# Altium PCB RFTuningBoard.PcbDoc
Units mil, origin at the board's own origin, x right, y up, seen from the top; angles counter-clockwise.
Board outline 2446.87 x 2446.87 mil, 4 copper layers (Top Layer, Ground Plane, Power Plane, Bottom Layer), stack 64.6 mil thick; 26 components, 11 nets, 65 pads, 138 vias.
Unrouted connection lines stored in the file: 3.
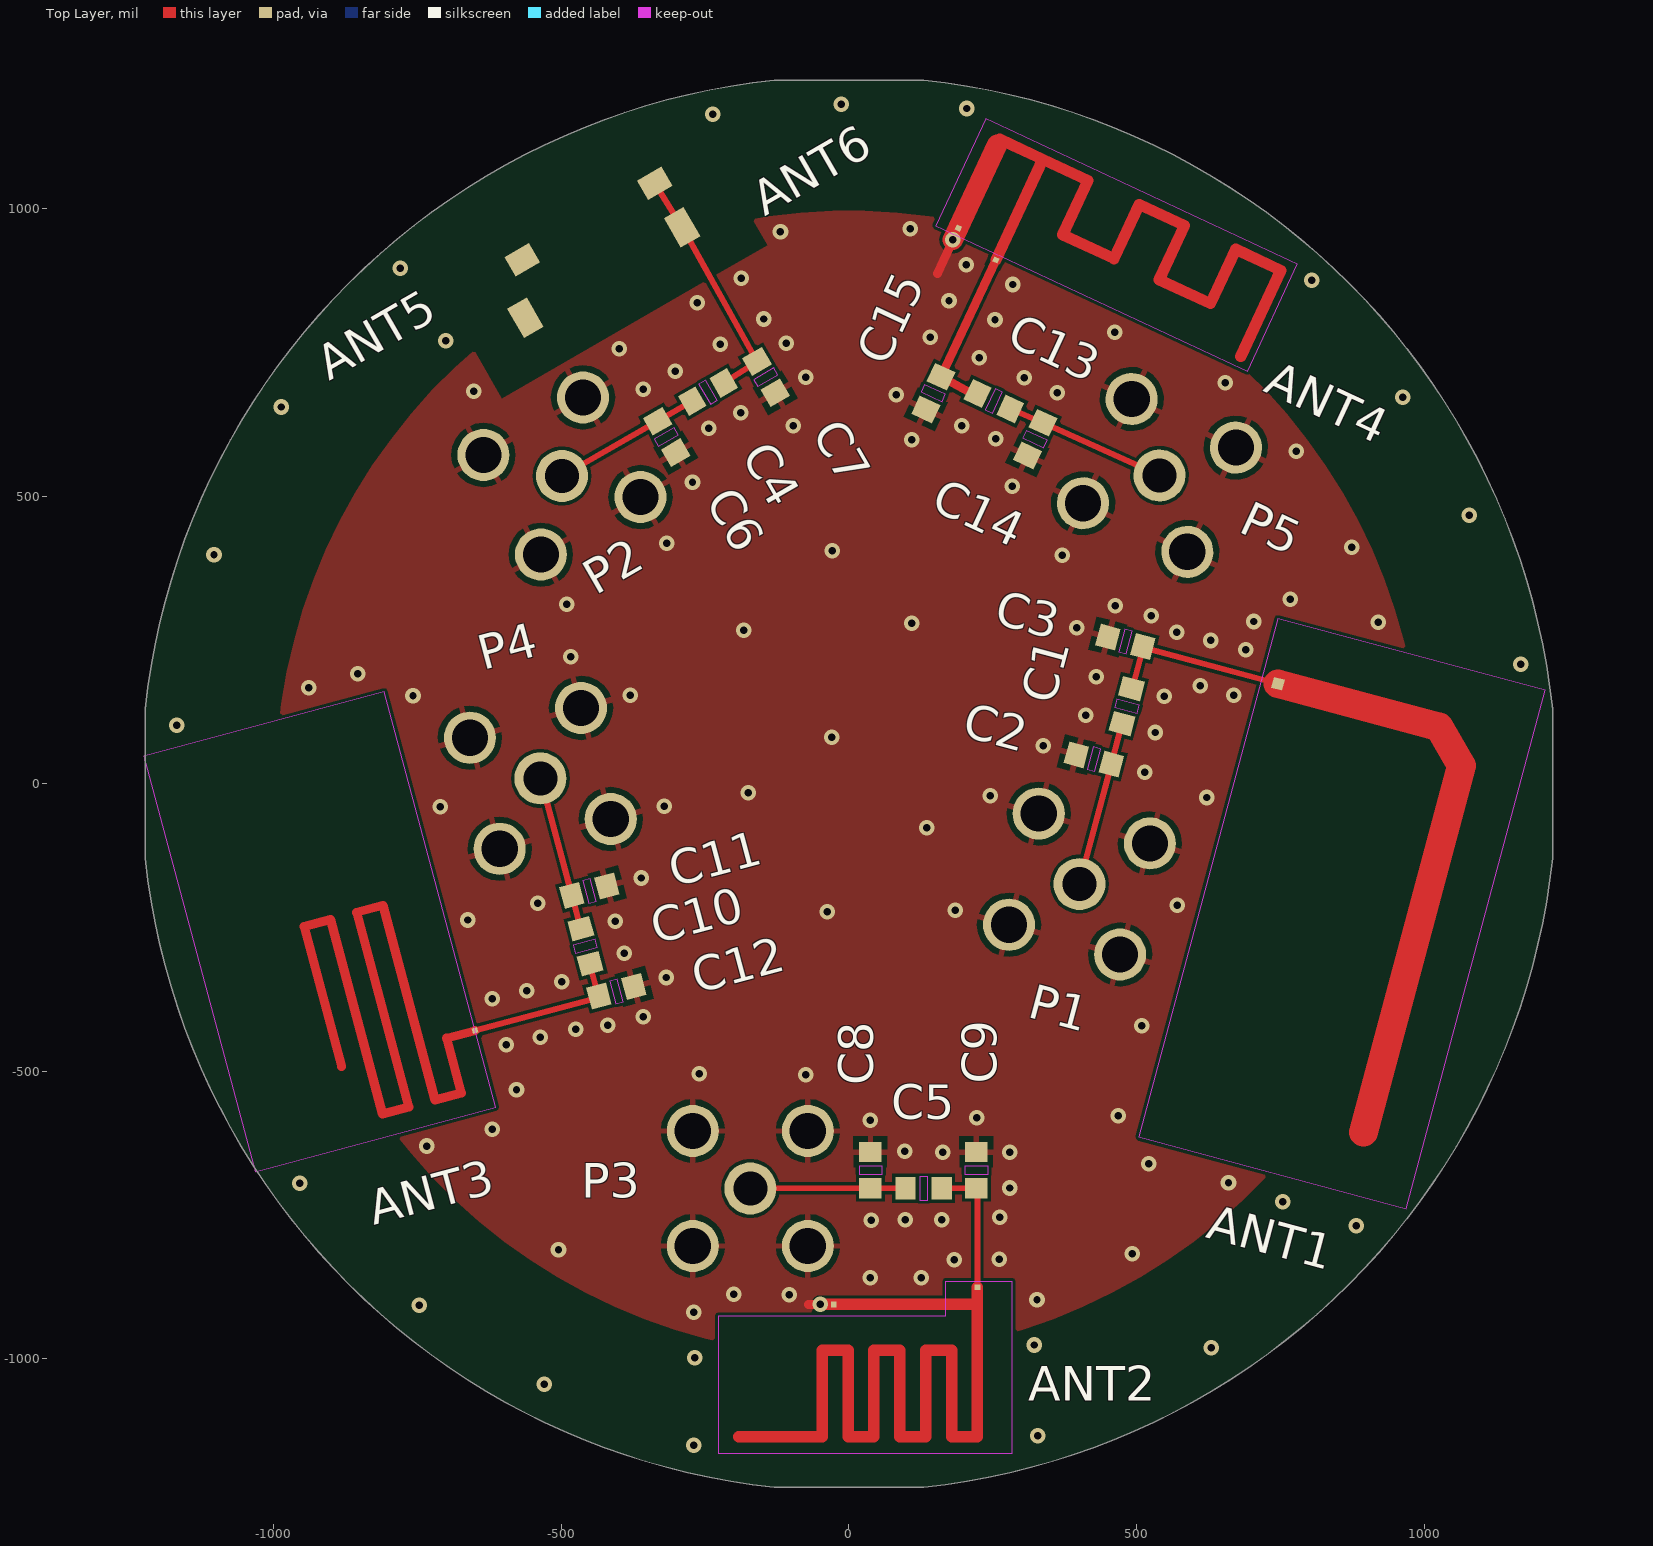
[diagram p0: Top Layer view]
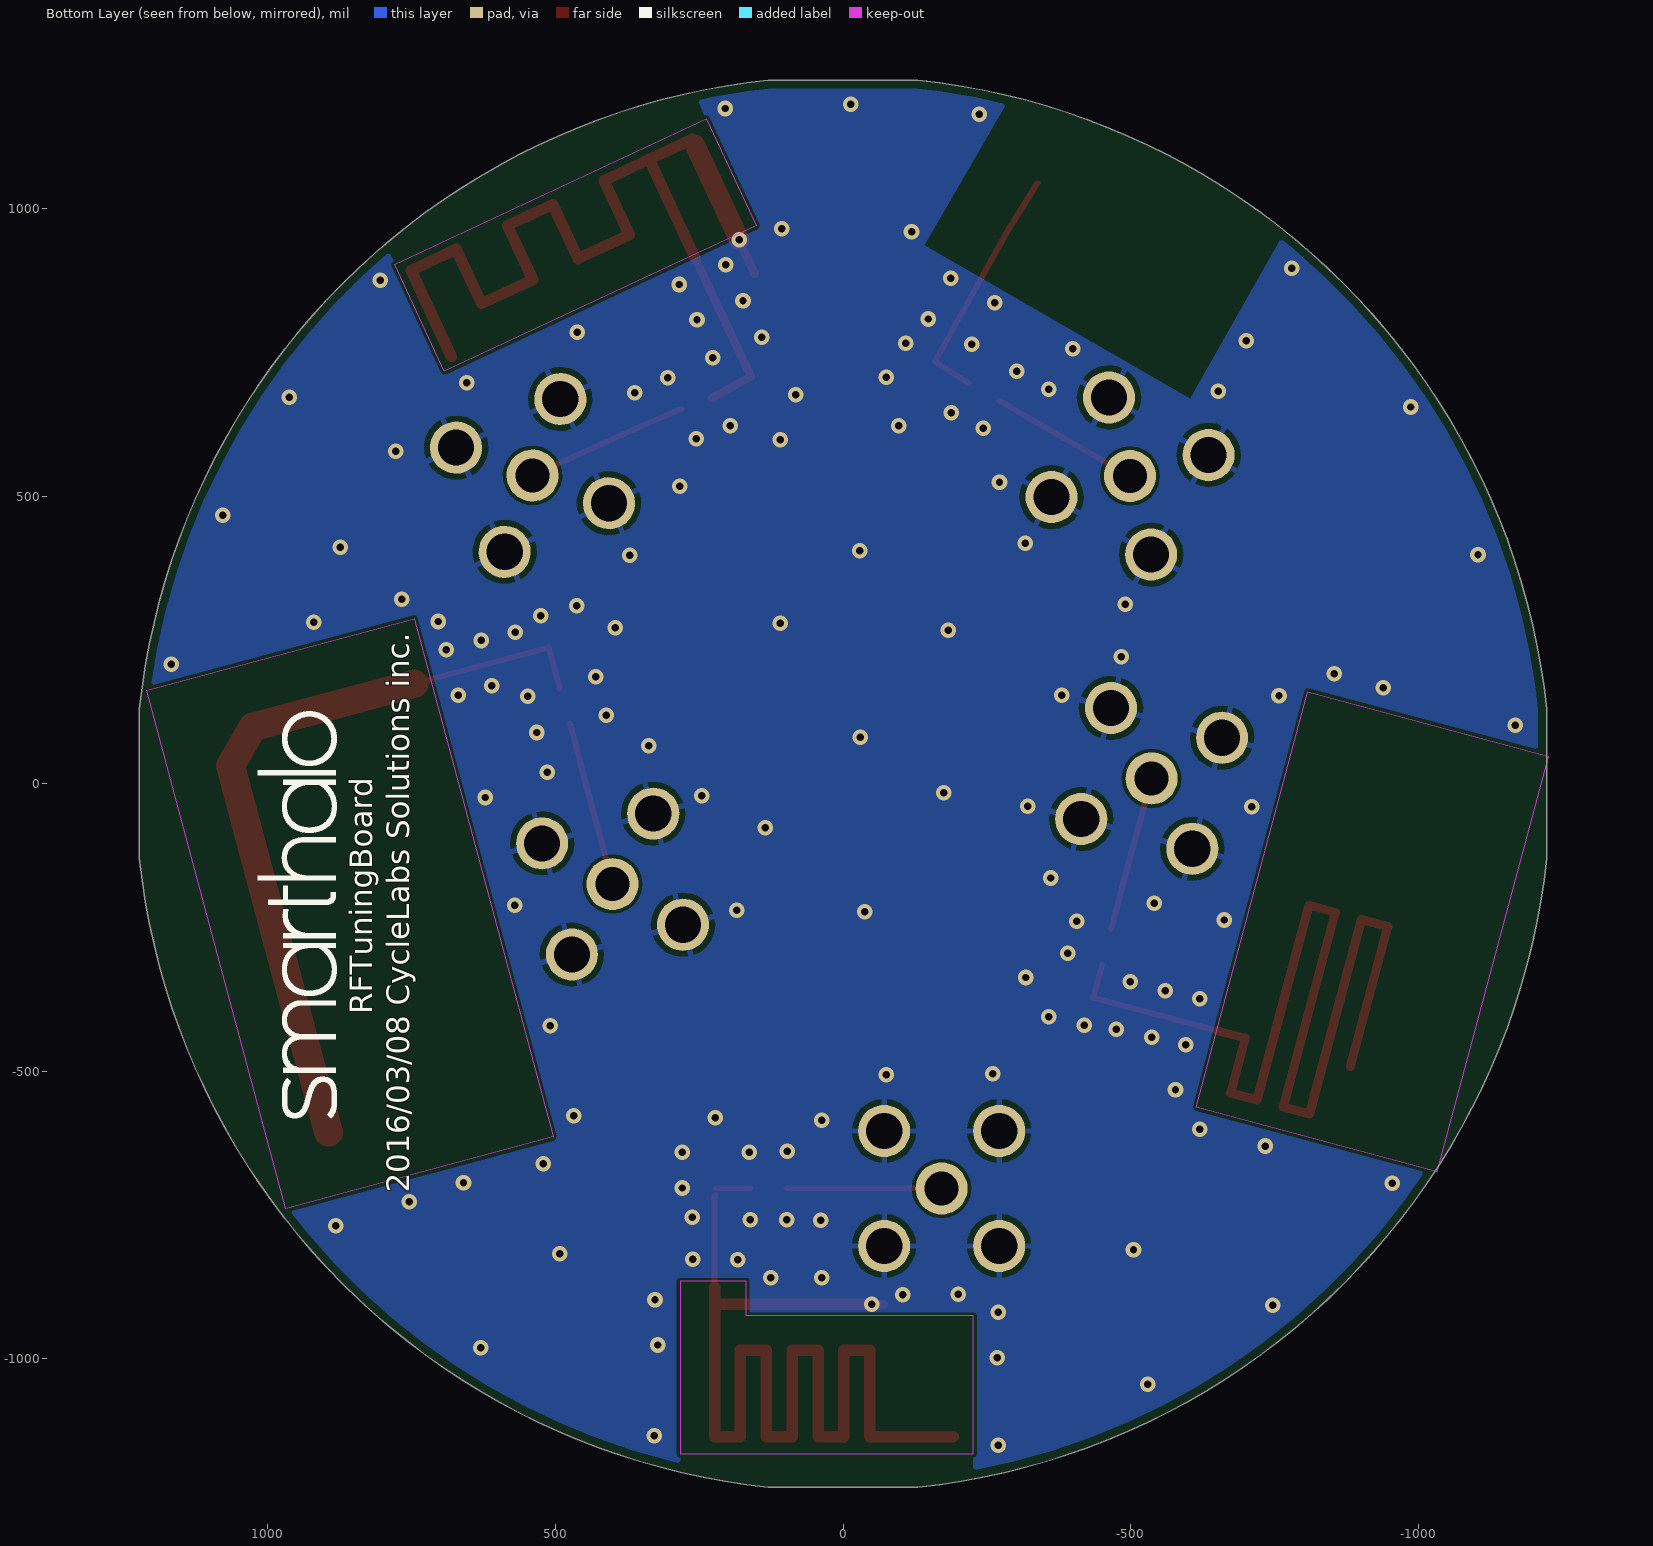
[diagram p1: Bottom Layer view, seen from below]
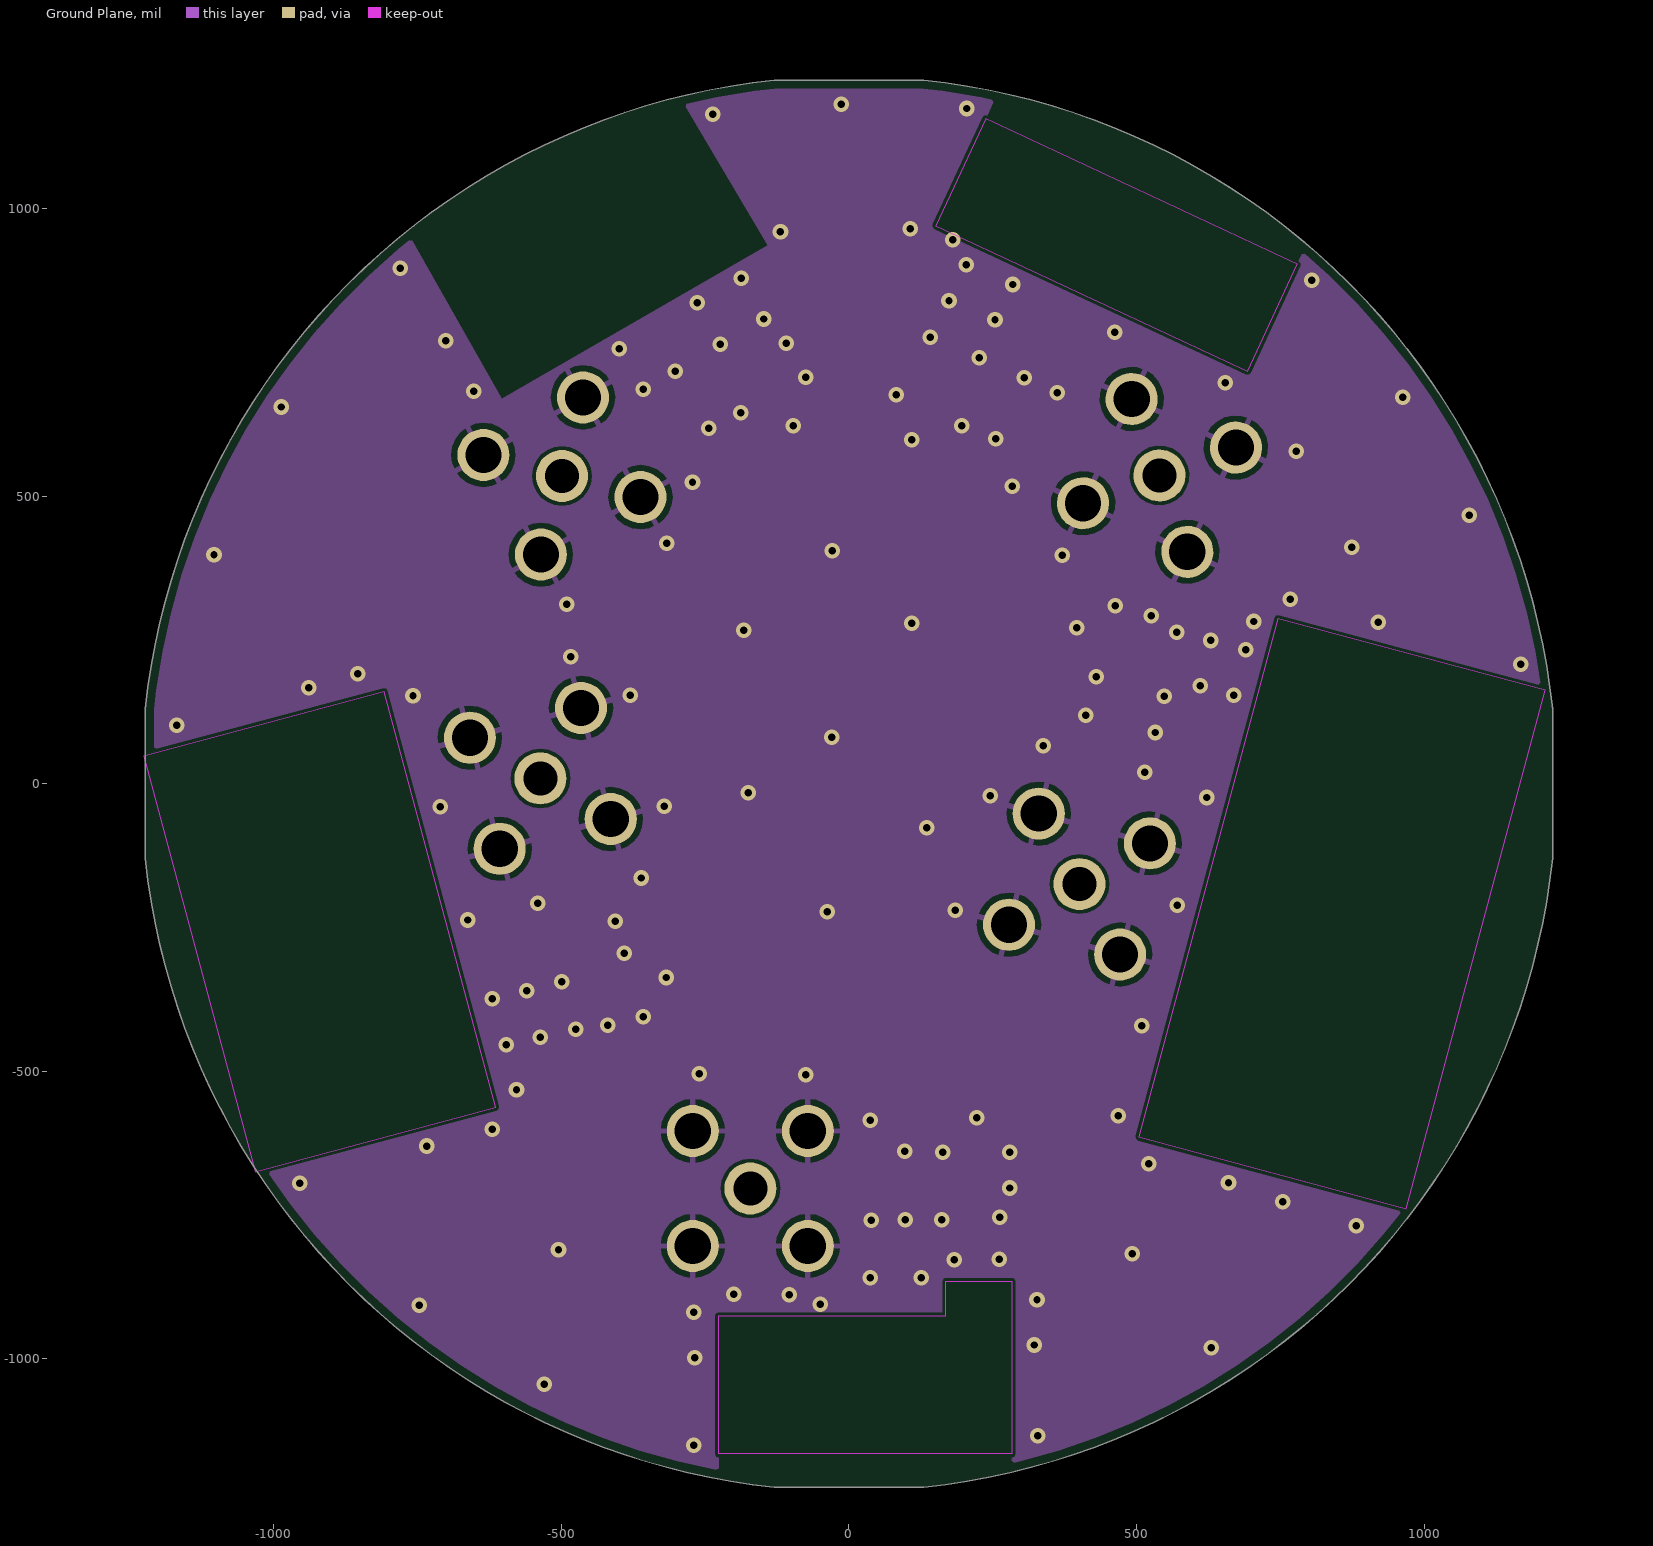
[diagram p2: Ground Plane]
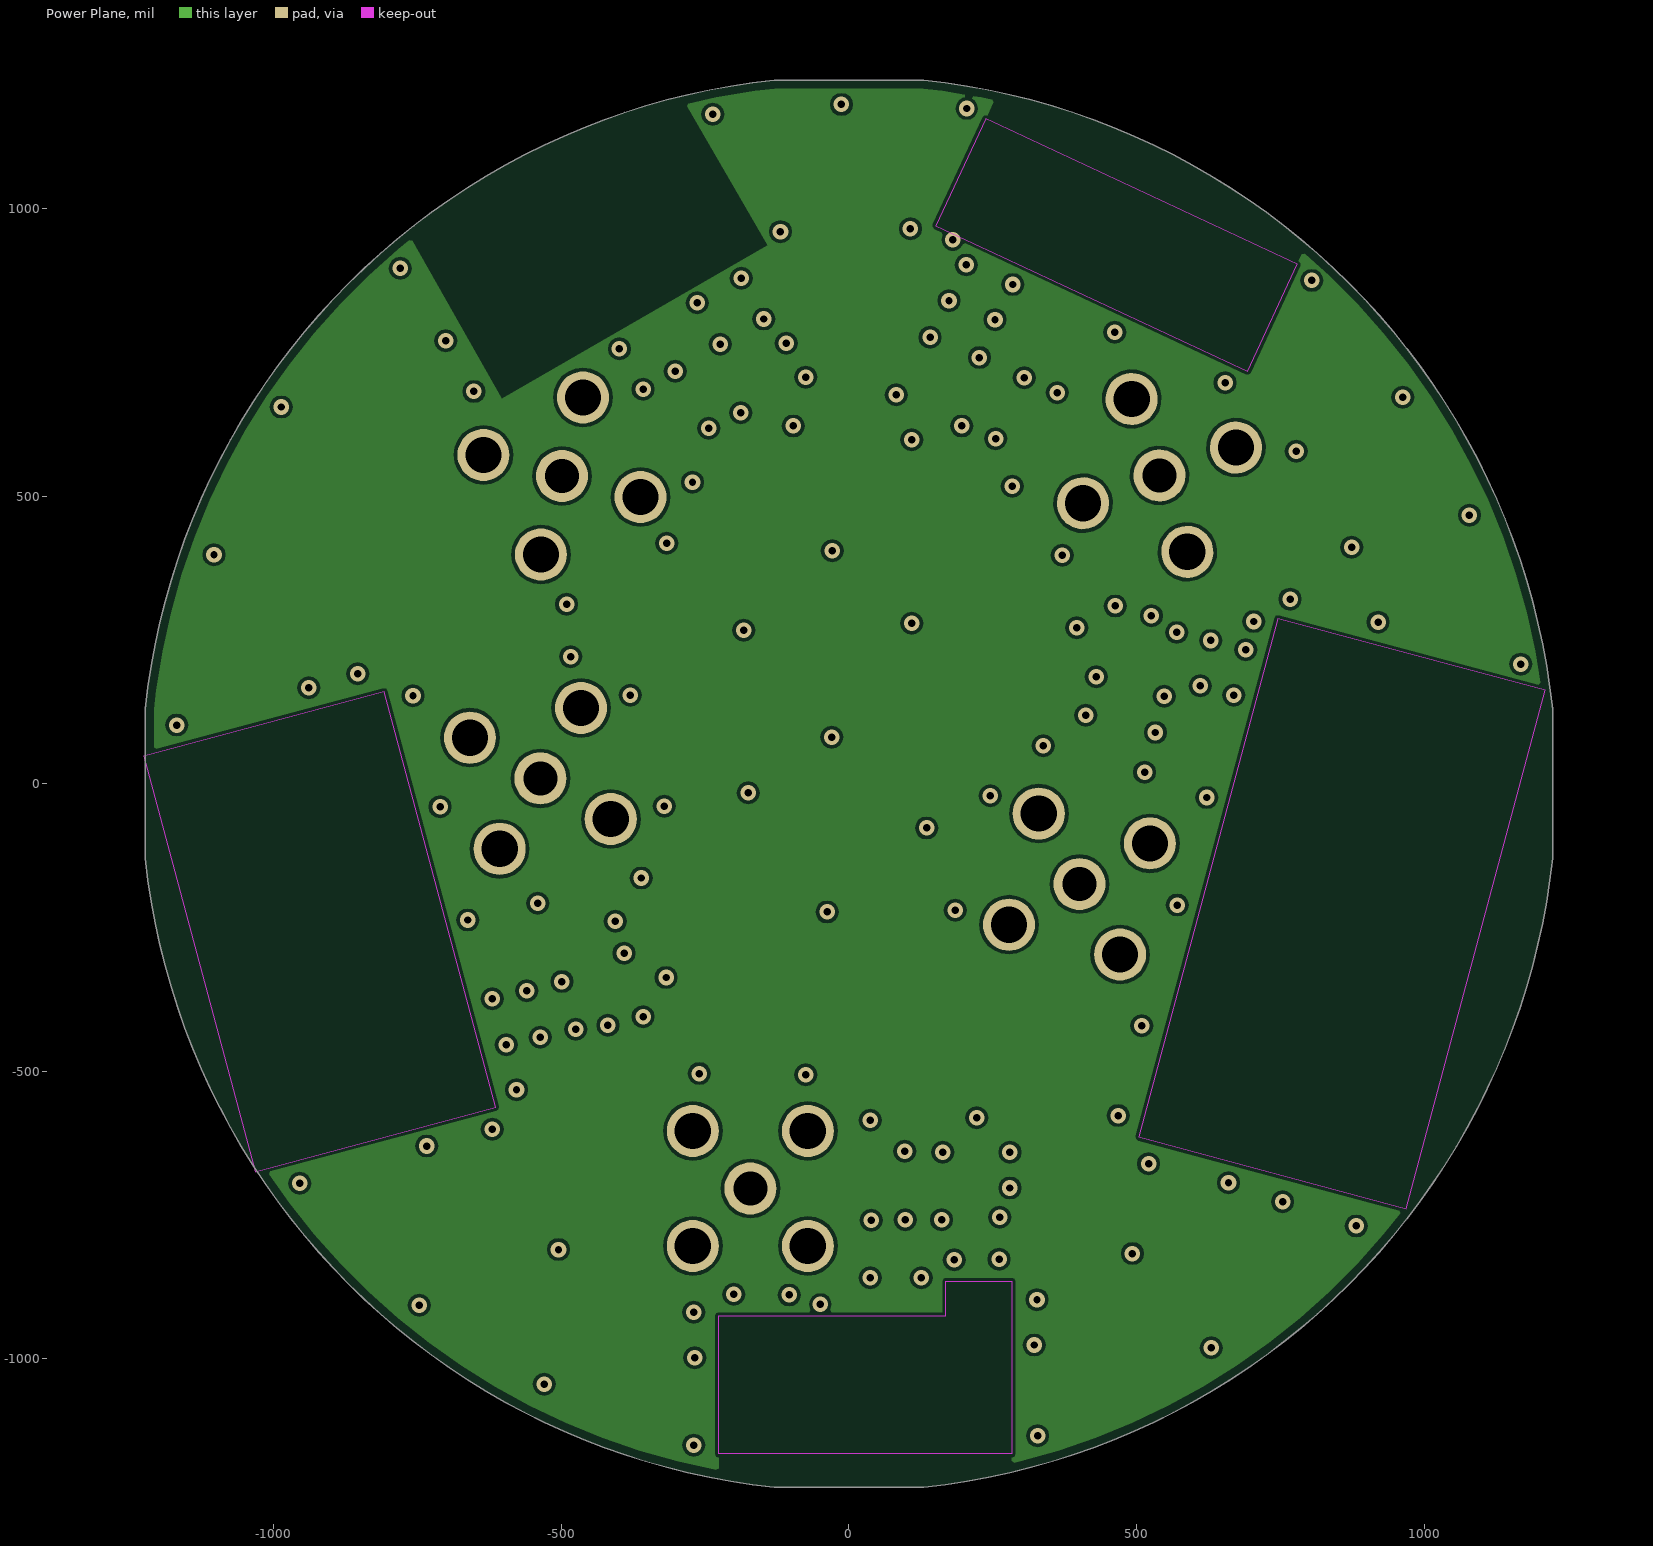
[diagram p3: Power Plane]

## Layer stack, top to bottom
Top Solder: solder mask 1, Solder Resist, Dk 3.5
Top Layer: signal copper 1.4
Dielectric 1: prepreg 6.7, FR408, Dk 3.67
Ground Plane: signal copper 0.7
Dielectric 2: core 47, FR408, Dk 3.67
Power Plane: signal copper 0.7
Dielectric 3: prepreg 6.7, Dk 3.67
Bottom Layer: signal copper 1.4
Bottom Solder: solder mask 1, Solder Resist, Dk 3.5

## Board outline
-129.92,-1223.44 cw(c0,0) -1223.44,-129.92 -1223.43,-129.92 -1223.43,129.92 -1223.44,129.92 cw(c0,0) -129.92,1223.44 -129.92,1223.43 129.92,1223.43 129.92,1223.44 cw(c0,0) 1223.44,129.92 1223.43,129.92 1223.43,-129.92 1223.44,-129.92 cw(c0,0) 129.92,-1223.44 129.92,-1223.43

## Design rules (kind name [scope] priority, off if disabled: settings)
AcuteAngle [All] p1: minimum=6.00000000000000E+0001 checktracksonly=FALSE
BoardOutlineClearance [All] p1: gap=15
Clearance [All] p1: gap=6
FanoutControl Fanout_LCC [IsLCC] p1: bgadir=Out bgaviamode=Centered fanoutstyle=Auto fanoutdirection=Alternating viagrid=1 // Fanout_LCC (Default Rule)
FanoutControl Fanout_BGA [IsBGA] p2: bgadir=Out bgaviamode=Centered fanoutstyle=Auto fanoutdirection=Alternating viagrid=1 // Fanout_BGA (Default Rule)
FanoutControl Fanout_Default [All] p4: bgadir=Out bgaviamode=Centered fanoutstyle=Auto fanoutdirection=Alternating viagrid=1 // Fanout_Default (Default Rule)
FanoutControl Fanout_Small [(CompPinCount < 5)] p5: bgadir=Out bgaviamode=Centered fanoutstyle=Auto fanoutdirection=OutThenIn viagrid=1 // Fanout_Small (Default Rule)
Height Height_TOP [OnLayer('Top Layer')] p2: minheight=0 maxheight=118.11 prefheight=39.37
Height Height_BOT [OnLayer('Bottom Layer')] p3: minheight=0 maxheight=787.4 prefheight=118.11
HoleSize [All] p1: absolutevalues=TRUE maxlimit=100 minlimit=13 maxpercent=80.000 minpercent=20.000
HoleToHoleClearance [All] p1: gap=6 allowstackedmicrovias=TRUE
MinimumAnnularRing [All] p1: minimumring=7
MinimumSolderMaskSliver [All] p1: minsoldermaskwidth=4
PolygonConnect PolygonConnect_1 [isVia And InNet('GND')] p1: connectstyle=Direct reliefconductorwidth=10 reliefentries=4 polygonreliefangle="90 Angle" airgapwidth=10
PolygonConnect [All] p2: connectstyle=Relief reliefconductorwidth=10 reliefentries=4 polygonreliefangle="90 Angle" airgapwidth=10
RoutingVias [All] p1: holewidth=13 width=27 viastyle="Through Hole" minholewidth=13 minwidth=27 maxholewidth=28 maxwidth=50
SilkToBoardRegionClearance SilkToBoardRegionClearance_1 [All] p2:
SolderMaskExpansion [All] p1: expansion=4
Width Width_RF50Ohm [(InNet('NetANT1_1') And Not InComponent('ANT1')) Or (InNet('NetANT2_1') And Not InComponent('ANT2')) Or (InNet('NetANT3_1') And Not InComponent('ANT3')) Or (InNet('NetANT4_1') And Not InComponent('ANT4')) Or (InNet('NetANT5_1') And Not InComponent('ANT5')) Or InNet('NetC10_1') Or InNet('NetC13_1') OR InNet('NetC1_1') Or InNet('NetC4_1') Or InNet('NetC5_1')] p1: maxlimit=10.42 minlimit=6 preferedwidth=10.42 toplayer_minwidth=10.41 midlayer1_maxwidth=10 midlayer1_prefwidth=8 midlayer2_maxwidth=10 midlayer2_prefwidth=8 bottomlayer_minwidth=10.41 impedancedriven=TRUE minimp=49.990000 maximp=50.010000 favimp=50.000000
Width Width_Antennas [InComponent('ANT1') Or InComponent('ANT2') Or InComponent('ANT3') Or InComponent('ANT4')] p2: maxlimit=100 minlimit=6 preferedwidth=8
Width Width_VBAT [InNet('VBAT')] p3 off: maxlimit=50 minlimit=8 preferedwidth=12
Width Width_BATSENSE [InNet('BAT_SENSE')] p4 off: maxlimit=50 minlimit=8 preferedwidth=12
Width Width_VCC [InNet('VCC')] p5 off: maxlimit=50 minlimit=8 preferedwidth=12
Width Width_GND [InNet('GND')] p6 off: maxlimit=20 minlimit=8 preferedwidth=12
Width [All] p7: maxlimit=15 minlimit=6 preferedwidth=10 toplayer_prefwidth=8 midlayer1_minwidth=10 midlayer1_maxwidth=10 midlayer2_minwidth=10 midlayer2_maxwidth=10 bottomlayer_minwidth=10 bottomlayer_maxwidth=10 minimp=50.000000 maximp=50.000000 favimp=50.000000
23 further rules are at their usual default settings.

## Components (designator, comment, footprint, x,y, rotation, side; value= is the part's Value field where it differs from the comment)
ANT1 "Antenna" ANTENNA_PCB_2.4GHZ 746.04,173.84 r255 top
ANT2 "Antenna" ANT_2.4GHZ_FR408_4L_CMIFA 223.43,-875.51 r180 top
ANT3 "Antenna" ANT_2.4GHZ_FR408_4L_Meander -649.98,-429.4 r105 top
ANT4 "Antenna" ANT_2.4GHZ_FR408_4L_TIFA 180.69,945.54 r335 top
ANT5 "ANT7020LL05R2400A" ANT7020LL05R2400A -452.73,977.6 r210 top
ANT6 "2500AT44M0400" 2500AT44M0400 -426.36,888.96 r210 top
C1 "TBD" CAPC0603(1608)100_N 483.32,134.74 r75 top
C2 "TBD" CAPC0603(1608)100_N 425.89,42.11 r165 top
C3 "TBD" CAPC0603(1608)100_N 480.66,246.52 r165 top
C4 "TBD" CAPC0603(1608)100_N -245,681 r30 top
C5 "TBD" CAPC0603(1608)100_N 129.89,-703.44 r0 top
C6 "TBD" CAPC0603(1608)100_N -317,603 r300 top
C7 "TBD" CAPC0603(1608)100_N -144,707 r300 top
C8 "TBD" CAPC0603(1608)100_N 37.37,-671.94 r90 top
C9 "TBD" CAPC0603(1608)100_N 221.43,-671.94 r90 top
C10 "TBD" CAPC0603(1608)100_N -457.98,-282.61 r285 top
C11 "TBD" CAPC0603(1608)100_N -451.25,-186.04 r15 top
C12 "TBD" CAPC0603(1608)100_N -404.38,-360.97 r15 top
C13 "TBD" CAPC0603(1608)100_N 252,665 r155 top
C14 "TBD" CAPC0603(1608)100_N 324,599 r245 top
C15 "TBD" CAPC0603(1608)100_N 147,679 r245 top
P1 "TE 5-1814832-1" TE_SMA_TH 400.82,-174.54 r255 top
P2 "TE 5-1814832-1" TE_SMA_TH -499,535 r30 top
P3 "TE 5-1814832-1" TE_SMA_TH -171.43,-703.79 r180 top
P4 "TE 5-1814832-1" TE_SMA_TH -536.55,9.23 r105 top
P5 "TE 5-1814832-1" TE_SMA_TH 540,536 r335 top

## Footprints (in the part's own frame and the unit in brackets; to place one, negate y for a bottom-side part, rotate by r counter-clockwise, add the part's x,y. Pads: shape width x height; smd on the part's side, far side on the other; paste and mask are expansions set on the pad)
2500AT44M0400 [mm] "Johanson Technology 2.45GHz SMD Chip Antenna, 8 x 1 mm body, 1 x 1.5 mm pads"
  rect 1x1.5 smd: 1(-4,0) 2(4,0)
  body extent -4,-0.5 4,0.5, height 1
ANT7020LL05R2400A [mm] "Yageo 2.45GHz SMD Chip Antenna, 7 x 2 mm body, 1.25 x 1 mm pads"
  rect 1.25x1 smd: 1(-3.375,0) 2(3.375,0)
  body extent -3.5,-1 3.5,1, height 0.75
ANT_2.4GHZ_FR408_4L_CMIFA [mil] "PCB printed Cypress MIFA antenna design for 2.4GHz band (TI) on FR408 4 layer substrate with internal ground plane (1 oz external cu/0.5 oz internal)"
  rect 10x10 smd: 1(250,30) 2(0,0)
  Top Layer lines w20: 415,260 270,260 270,110 225,110 225,260 180,260 180,110 135,110 135,260 90,260 90,110 45,110 45,260 0,260 0,30 ; 273,30 250,30 0,30 ; 0,0 0,8.35 0,30
  Keep-Out Layer region: -60,290 450,290 450,50 345,50 245,50 145,50 55,50 55,20 55,-10 -60,-10
ANT_2.4GHZ_FR408_4L_Meander [mm] "PCB printed meander antenna design for 2.4GHz band on FR408 4 layer substrate with internal ground plane (1 oz external cu/0.5 oz internal)"
  rect 0.25x0.25 smd: 1(0,0)
  Top Layer lines w0.4: 0,6.1 6.4,6.1 6.4,4.9 -2.5,4.9 -2.5,3.7 6.4,3.7 6.4,2.5 -2.5,2.5 -2.5,1.3 0,1.3 0,0
  Keep-Out Layer region: -3.5,0 15.5,0 15.5,11 -3.5,11
ANT_2.4GHZ_FR408_4L_TIFA [mil] "PCB printed IFA antenna design for 2.4GHz band (TI) on FR408 4 layer substrate with internal ground plane (1 oz external cu/0.5 oz internal)"
  rect 10x10 smd: 1(0,22.64) 2(82.68,0)
  Top Layer lines w19.68: 82.68,0 82.68,192.91 ; 0,192.91 82.68,192.91 ; 539.37,27.95 539.37,192.91 452.76,192.91 452.76,88.98 354.33,88.98 354.33,192.91 267.72,192.91 267.72,88.98 169.29,88.98 169.29,192.91 82.68,192.91
  Top Layer lines w35.43: 0,0 0,22.64 0,183.07
  Keep-Out Layer region: -37.4,9.84 561.02,9.84 561.02,214.57 -37.4,214.57
ANTENNA_PCB_2.4GHZ [mm] "ANT_PCB_2.4GHZ_NRF51422_1.6MM_1OZ"
  rect 0.5x0.5 smd paste-1.27: 1(0,0)
  Top Layer lines w1.27: 0,0 0,7.37 1.4,8.77 18.16,8.77
  Keep-Out Layer region: 20.925,-0.75 20.925,11.475 -2.775,11.475 -2.775,-0.75
CAPC0603(1608)100_N [mm] "Chip Capacitor, Body 1.6x0.8mm, Height 1.0mm, IPC Medium Density"
  rect 0.9x1 smd: 1(-0.8,0) 2(0.8,0)
  Top Layer keep-out region: -0.175,-0.525 0.175,-0.525 0.175,0.5 -0.175,0.5
  body extent -0.87,-0.48 0.88,0.47, height 1
TE_SMA_TH [mm] "CONN SMA JACK STR 50 OHM PCB, 4 x 1.6mm holes, 1.5mm central hole, 5.08mm pitch"
  round 2.3 hole 1.5: 1(0,0)
  round 2.3 hole 1.6: 2(-2.54,-2.54) 2(-2.54,2.54) 2(2.54,-2.54) 2(2.54,2.54)
  body extent -3.2,-3.2 3.2,3.2, height 11.2

## Part data
ANT1 ANT3: library part ANTENNA_PCB_2.4GHz, "Antenna PCB, 2.4GHz, 26.11 mm x 1.27 mm, FR4 60 mils, Er = 4.2"
ANT2 ANT4: library part ANTENNA_PCB_2.4GHz_2PINS, "Antenna PCB, 2.4GHz"
ANT5: "CHIP ANTENNA, 2.45GHz, 7 x 2 mm body"
ANT6: "CHIP ANTENNA, 2.45GHz, 8 x 1 mm body"
C1 C2 C3 C4 C5 C6 C7 C8 C9 C10 C11 C12 C13 C14 C15: "Chip Cap 0603 X7R 10%"
P1 P2 P3 P4 P5: library part 5-1814832-1, "CONN SMA JACK STR 50 OHM PCB"

## Via types
v1: diameter 27, hole 13, Top Layer to Bottom Layer, tented top, 136 vias
v2: diameter 27, hole 13, Top Layer to Bottom Layer, 2 vias

## Nets (pads, with @x,y where several pads share a name; then routed paths per layer and width w, separated by ;. In a path a pad name is that pad's centre, name@x,y a point inside that pad or via, vN(x,y) a via of type N, cw(c..) or ccw(c..) an arc to the next point about the centre after c; other vN are vias at no path point)
GND: ANT2.2 ANT4.2 C2.2 C3.2 C6.2 C7.2 C8.2 C9.2 C11.2 C12.2 C14.2 C15.2 P1.2 P2.2 P3.2 P4.2 P5.2 | length 546.5
  Top Layer w10.42: 221.42,-715.42 223.43,-717.43 ANT2.2
  Top Layer w15: -70.51,-905.51 v2(-49.57,-905.51) ; 154,887 v2(180.69,945.54) ; 227,671 160.31,707.55 ANT4.2
  other v1: -270,-1150 328,-1134 -530,-1044 -268,-998 630,-981 322,-976 -270,-919 -747,-907 327,-897 -104,-889 -200,-888 37,-859 126,-859 183,-828 261,-827 493,-817 -505,-810 882,-769 39,-759 98,-758 161,-758 262,-754 754,-727 280,-703 -955,-695 660,-694 521,-661 163,-641 280,-641 97,-639 -734,-630 -620,-601 37,-585 222,-581 468,-577 -578,-532 -75,-506 -260,-504 -596,-454 -537,-441 -475,-427 509,-421 -419,-420 -358,-405 -620,-374 -560,-360 -499,-344 -318,-337 -391,-295 -406,-239 -663,-237 -38,-223 185,-220 571,-211 -541,-208 -361,-164 135,-77 -711,-40 -321,-39 622,-24 246,-21 -175,-16 514,20 338,66 -30,81 533,89 -1169,102 412,119 548,152 -758,153 -380,154 669,154 -939,167 611,170 430,186 -854,191 1168,208 -484,221 690,233 629,249 570,263 -183,267 396,271 109,279 920,281 704,282 526,292 463,309 -491,312 767,321 371,397 -1104,398 -29,405 874,411 -317,418 1079,467 284,517 -272,524 778,578 109,598 255,600 -244,618 -97,622 196,622 -188,645 -987,655 963,672 82,676 362,680 -652,682 -358,686 654,697 305,706 -75,707 -302,717 227,741 -399,756 -224,764 -109,766 -701,770 141,776 462,785 254,807 -148,808 -264,836 174,840 285,868 805,875 -187,879 -780,896 204,902 -119,960 107,965 -237,1164 205,1174 -13,1181
NetANT1_1: ANT1.1 C1.2 C3.1 | length 684.7
  Top Layer w10.42: C1.2@492.68,165.86 C3.1@511.78,237.16 ; C3.1@511.64,236.65 ANT1.1
  Top Layer w10.43: ANT1.1@746.06,173.9 1026.45,98.77 1065.34,31.41 1065.29,31.23
NetANT2_1: ANT2.1 C5.2 C9.1 | length 60
  Top Layer w10.42: C5.2 C9.1
NetANT3_1: ANT3.1 C10.2 C12.1 | length 279.6
  Top Layer w10.42: ANT3.1 C12.1@-434.15,-371.57 ; C10.2@-450.51,-314.22 C12.1@-435.99,-368.44
NetANT4_1: ANT4.1 C13.2 C15.1
NetANT5_1: ANT5.1 ANT6.1 C4.2 C7.1 | length 426.4
  Top Layer w10.42: ANT5.1 ANT6.1 C7.1 C4.2
NetC1_1: C1.1 C2.1 P1.1 | length 288.2
  Top Layer w10.42: P1.1@400.57,-174.1 C2.1 ; C2.1@456.23,33.98 C1.1@475.08,104.34
NetC4_1: C4.1 C6.1 P2.1 | length 261.5
  Top Layer w10.42: P2.1 C6.1 C4.1
NetC5_1: C5.1 C8.1 P3.1 | length 270.6
  Top Layer w10.42: P3.1@-171.07,-703.44 C8.1 C5.1
  Top Layer w10.43: P3.1@-169.43,-722.79 P3.1@-168.62,-721.98
NetC10_1: C10.1 C11.1 P4.1 | length 270.4
  Top Layer w10.42: P4.1@-536.11,8.98 C11.1 C10.1
NetC13_1: C13.1 C14.1 P5.1 | length 284.1
  Top Layer w10.42: C13.1 C14.1 P5.1
pads on no net: ANT5.2 ANT6.2

## Polygon pours and split planes (outlines as drawn)
GND on Top Layer "Top GND" (solid, remove dead copper, pour order 0): 0,-996.06 cw(c0,0) -996.06,0 cw(c0,0) 0,996.06 cw(c0,0) 996.06,0 cw(c0,0)
GND on Ground Plane "Internal Ground Plane" (solid, remove dead copper, pour order 10): -129.93,-1223.44 cw(c0,0) -1223.44,-129.93 -1223.43,-129.92 -1223.43,129.92 -1223.44,129.93 cw(c0,0) -129.93,1223.44 -129.92,1223.43 129.92,1223.43 129.93,1223.44 cw(c0,0) 1223.44,129.93 1223.43,129.92 1223.43,-129.92 1223.44,-129.93 cw(c0,0) 129.93,-1223.44 129.92,-1223.43
no net on Power Plane "Internal Power Plane" (solid, pour order 8): -1223.43,-129.92 -1223.43,129.92 -1223.44,129.93 cw(c0,0) -129.93,1223.44 -129.92,1223.43 129.92,1223.43 129.93,1223.44 cw(c0,0) 1223.44,129.93 1223.43,129.92 1223.43,-129.92 1223.44,-129.93 cw(c0,0) 129.93,-1223.44 129.92,-1223.43 -129.92,-1223.43 -129.93,-1223.44 cw(c0.01,0)
GND on Bottom Layer "Bottom Ground Plane" (solid, remove dead copper, pour order 4): -129.93,-1223.44 cw(c0,0) -1223.44,-129.93 -1223.43,-129.92 -1223.43,129.92 -1223.44,129.93 cw(c0,0) -129.93,1223.44 -129.92,1223.43 129.92,1223.43 129.93,1223.44 cw(c0,0) 1223.44,129.93 1223.43,129.92 1223.43,-129.92 1223.44,-129.93 cw(c0,0) 129.93,-1223.44 129.92,-1223.43

## Keep-outs
Mechanical 3:
  circle w39.37: c0,0 r996.06

## Other copper
Top Layer:
  pour cut-out: 1326,129.92 744.59,286.31 503.35,-614.01 1104,-775
  pour cut-out: -226.57,-1227 -226.57,-925.51 168.43,-925.51 168.43,-865.51 283.43,-865.51 283.43,-1227
  pour cut-out: 150.95,970.26 287,1261 836,1026 693.31,717.36
  pour cut-out: -603.9,669.43 -786,991 -308,1223.44 -141.05,936.66
  pour cut-out: -614.32,-562.5 -807.92,160.04 -1336.18,17.18 -1151,-707
Ground Plane:
  pour cut-out: -226.57,-1227 -226.57,-925.51 168.43,-925.51 168.43,-865.51 283.43,-865.51 283.43,-1227
  pour cut-out: 1326,129.92 744.59,286.31 503.35,-614.01 1104,-775
  pour cut-out: 150.95,970.26 285,1258 836,1026 693.31,717.36
  pour cut-out: -603.9,669.43 -786,991 -311,1223.43 -141.05,936.66
  pour cut-out: -614.32,-562.5 -807.92,160.04 -1336.18,17.18 -1151,-707
Power Plane:
  pour cut-out: -226.57,-1227 -226.57,-925.51 168.43,-925.51 168.43,-865.51 283.43,-865.51 283.43,-1227
  pour cut-out: 1326,129.92 744.59,286.31 503.35,-614.01 1104,-775
  pour cut-out: 150.95,970.26 286,1259 836,1026 693.31,717.36
  pour cut-out: -603.9,669.43 -786,991 -308,1223.44 -141.05,936.66
  pour cut-out: -614.32,-562.5 -807.92,160.04 -1336.18,17.18 -1151,-707
Bottom Layer:
  pour cut-out: -603.9,669.43 -786,991 -308,1223.44 -141.05,936.66
  pour cut-out: -614.32,-562.5 -807.92,160.04 -1336.18,17.18 -1151,-707
  pour cut-out: -226.57,-1227 -226.57,-925.51 168.43,-925.51 168.43,-865.51 283.43,-865.51 283.43,-1227
  pour cut-out: 1326,129.92 744.59,286.31 503.35,-614.01 1104,-775
  pour cut-out: 150.95,970.26 285,1258 836,1026 693.31,717.36

## Silkscreen, mask and mechanical layers (free items; w line width, h text height)
Bottom Overlay:
  drawing of 4068 lines, arcs and shapes, not listed
  text "RFTuningBoard" at 818.58,-401.02 h39.37 r270
  text "2016/03/08 CycleLabs Solutions inc." at 754.58,-711.02 h39.37 r270
Outline:
  the board outline again, w10
Mechanical 3:
  lines w10: -1157.8,-122.96 ccw(c0,0) -122.96,-1157.8 ; -1157.8,122.96 cw(c0,0) -122.96,1157.8 ; -1157.43,-129.92 -1157.43,129.92 ; -129.92,-1157.43 129.92,-1157.43 ; -129.92,1157.43 129.92,1157.43 ; 122.96,-1157.8 ccw(c0,0) 1157.8,-122.96 ; 122.96,1157.8 cw(c0,0) 1157.8,122.96 ; 1157.43,-129.92 1157.43,129.92